# Altium PCB capacitance stub.PcbDoc
Units mil, origin at the board's own origin, x right, y up, seen from the top; angles counter-clockwise.
Board outline 1050 x 400 mil, 2 copper layers (Top Layer, Bottom Layer), stack 67.512 mil thick; 3 components, 2 nets, 9 pads, 0 vias.
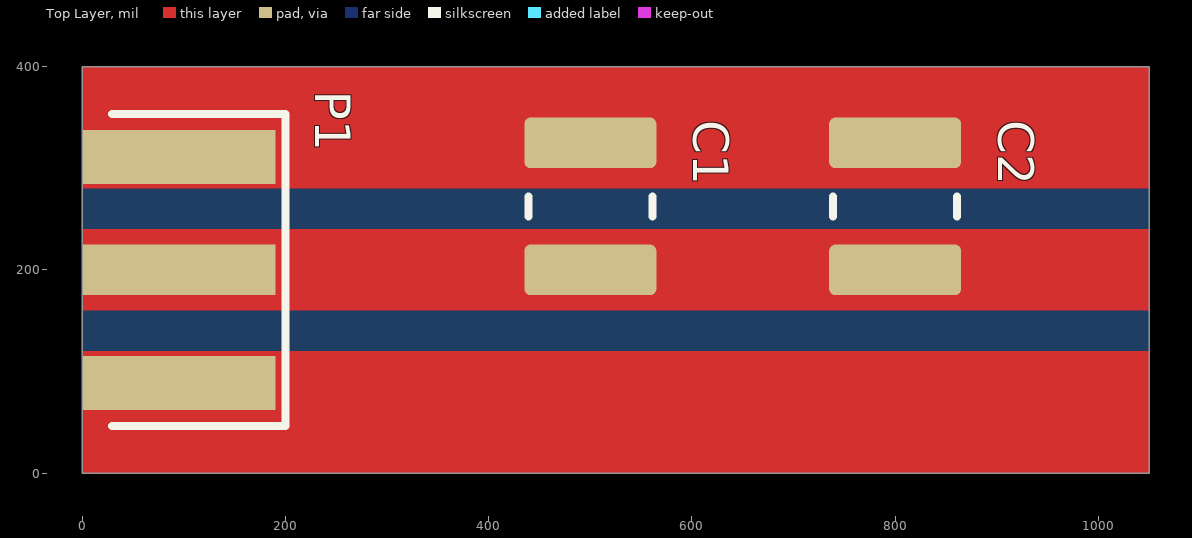
[diagram p0: Top Layer view]
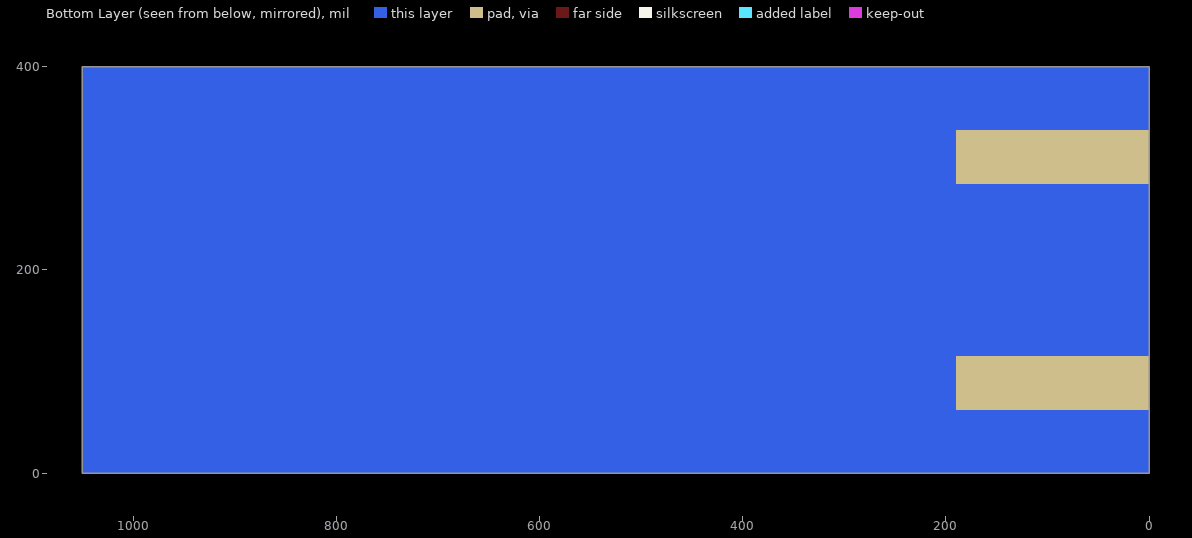
[diagram p1: Bottom Layer view, seen from below]

## Layer stack, top to bottom
Top Layer: signal copper 2.7559
Dielectric 1: core 62, Core-043, Dk 4.3
Bottom Layer: signal copper 2.7559

## Board outline
0,0 1050,0 1050,400 0,400

## Design rules (kind name [scope] priority, off if disabled: settings)
AcuteAngle [All] p1: minimum=6.00000000000000E+0001 checktracksonly=FALSE
BoardOutlineClearance [All] p1: gap=15 ignorepadtopadclearanceinfootprint=FALSE
Clearance [All] p1: gap=6 ignorepadtopadclearanceinfootprint=FALSE except(0: Arc-Hole Track-Hole SMDPad-Hole THPad-Hole Via-Hole Fill-Hole Poly-Hole Region-Hole Text-Hole)
ComponentClearance [All] p1: gap=1 collisioncheckmode=3 verticalgap=1 showdistances=FALSE
DiffPairsRouting [All] p1: maxlimit=393.7 minlimit=6 mostfreqgap=8 toplayer_minwidth=6 toplayer_maxwidth=15 toplayer_prefwidth=8 bottomlayer_minwidth=6 bottomlayer_maxwidth=15 bottomlayer_prefwidth=8 maxuncoupledlength=500
HoleSize SlotSize [(HoleType = 'Slot')] p1: absolutevalues=TRUE maxlimit=265 minlimit=20 maxpercent=80.000 minpercent=20.000
HoleSize [All] p2: absolutevalues=TRUE maxlimit=265 minlimit=10 maxpercent=80.000 minpercent=20.000
HoleToHoleClearance [All] p1: gap=10 allowstackedmicrovias=FALSE
MinimumAnnularRing [All] p1: minimumring=5
MinimumSolderMaskSliver [All] p1: minsoldermaskwidth=0
PlaneClearance [All] p1: clearance=10
PlaneConnect [All] p1: planeconnectstyle=Direct reliefexpansion=16 reliefentries=4 reliefconductorwidth=6 reliefairgap=6
PolygonConnect [All] p1: thpad.connectstyle=Relief thpad.reliefconductorwidth=10 thpad.reliefentries=4 thpad.polygonreliefangle="90 Angle" thpad.airgapwidth=10 smdpad.connectstyle=Relief smdpad.reliefconductorwidth=8 smdpad.reliefentries=4 smdpad.polygonreliefangle="90 Angle" smdpad.airgapwidth=6 via.connectstyle=Direct via.reliefconductorwidth=8 via.reliefentries=4 via.polygonreliefangle="90 Angle" via.airgapwidth=6
RoutingCorners [All] p1: cornerstyle=45-Degree minsetback=49.21 maxsetback=49.21
RoutingVias [All] p1: holewidth=15 width=30 viastyle="Through Hole" minholewidth=13 minwidth=27 maxholewidth=100 maxwidth=114
SMDNeckDown [All] p1: percent=100.000
SilkToSilkClearance SilkTextToSilk [IsText AND OnSilkscreen] p1: silktosilkclearance=5
SilkToSilkClearance [All] p2: silktosilkclearance=0
SilkToSolderMaskClearance [IsPad] p1: minsilkscreentomaskgap=6 clearancetoexposedcopper=TRUE
SolderMaskExpansion "Tent Vias" [IsVia] p1: expansion=4 istentingtop=TRUE
SolderMaskExpansion [All] p2: expansion=2.95 istentingtop=FALSE
SupplyNets "Schematic Supply Nets" [InNet('GND')] p1: voltage=0.000
Width [All] p1: maxlimit=400 minlimit=6 preferedwidth=8
20 further rules are at their usual default settings.

## Components (designator, comment, footprint, x,y, rotation, side; value= is the part's Value field where it differs from the comment)
C1 "800B100JT500XT1K" "CAP_1111_ATC 800B" 500,262.5 r270 top value=10pF
C2 "800B1R5BT500XT1K" "CAP_1111_ATC 800B" 800,262.5 r270 top value=1.5pF
P1 "EMPCB.SMAMST.A" FP-EMPCB.SMAMST.A 0,200 r270 top

## Footprints (in the part's own frame and the unit in brackets; to place one, negate y for a bottom-side part, rotate by r counter-clockwise, add the part's x,y. Pads: shape width x height; smd on the part's side, far side on the other; paste and mask are expansions set on the pad)
"CAP_1111_ATC 800B" [mil] "Chip Capacitor, 2-Leads, Body 2.92x2.79mm, IPC Medium Density"
  rrect25% 50x129.92 smd: 1(-62.5,0) 2(62.5,0)
  silkscreen extent -10,-61 10,61, body extent -55,-55 55,55, height 70
FP-EMPCB.SMAMST.A [mil]
  rect 50x190 smd paste+0 mask+0: 1(0,95)
  rect 53.15x190 smd paste+0 mask+0: 2(-111.22,95) 2(111.22,95)
  rect 53.15x190 smd far side paste+0 mask+0: 2(-111.22,95) 2(111.22,95)
  silkscreen extent -154,29 154,200, body extent -182,-500 182,187, height 172

## Part data
C1: library part CMP-001-00027-1, "Ceramic Capacitor, Multilayer, Ceramic, 500V, 5% +Tol, 5% -Tol, C0G, 30ppm/Cel TC, 0.00001uF, Surface Mount, 1111", Capacitor Type=Ceramic, Case/Package=1111, Max Operating Temperature=125°C, Min Operating Temperature=-55°C, Voltage=500V, China RoHS=Compliant, Dielectric Material=Ceramic, Height=1.78mm, Length=2.79mm, Lifecycle Status=Production, Mount=SMD, Mounting Technology="Surface Mount", Number of Terminals=2, REACH SVHC=Yes, RoHS=Compliant, Voltage Rating (DC)=500V, Width=2.79mm
C2: library part CMP-001-00043-1, "Ceramic Capacitor, Multilayer, Ceramic, 500V, 33.3333% +Tol, 33.3333% -Tol, C0G, 30ppm/Cel TC, 0.0000015uF, Surface...", Capacitor Type=Ceramic, Case/Package=1111, Max Operating Temperature=125°C, Min Operating Temperature=-55°C, Voltage=500V, China RoHS=Compliant, Dielectric Material=Ceramic, Height=1.78mm, Length=2.79mm, Lifecycle Status=Production, Mount=SMD, Mounting Technology="Surface Mount", Number of Terminals=2, REACH SVHC=Yes, RoHS=Compliant, Voltage Rating (DC)=500V, Width=2.79mm
P1: library part CMP-00823-1, "Rf Coax Connector, Sma Plug, 50 Ohm, Edge Mnt; SMA Plug", RoHS=Compliant

## Nets (pads, with @x,y where several pads share a name; then routed paths per layer and width w, separated by ;. In a path a pad name is that pad's centre, name@x,y a point inside that pad or via, vN(x,y) a via of type N, cw(c..) or ccw(c..) an arc to the next point about the centre after c; other vN are vias at no path point)
GND: C1.1 C2.1 P1.2
SIGNAL: C1.2 C2.2 P1.1

## Other copper
Top Layer:
  rectangle net GND: 0,280 1050,400
  rectangle net SIGNAL: 0,160 1050,240
  rectangle net GND: 0,0 1050,120
Bottom Layer:
  rectangle net GND: 0,0 1050,400

## Silkscreen, mask and mechanical layers (free items; w line width, h text height)
Board Outline:
  the board outline again, w10

## Text inside footprints (layer, text, board x,y; h text height)
P1: Designer Notes "Board Edge" at -59.07,334.64 h35 r270